# Altium PCB STM32F103ZET6.PCBDOC (part 1 of 5)
Units mil, origin at the board's own origin, x right, y up, seen from the top; angles counter-clockwise.
Board outline 7118.03 x 3660.03 mil, 2 copper layers (Top Layer, Bottom Layer); 158 components, 198 nets, 727 pads, 128 vias.
Unrouted connection lines stored in the file: 5.
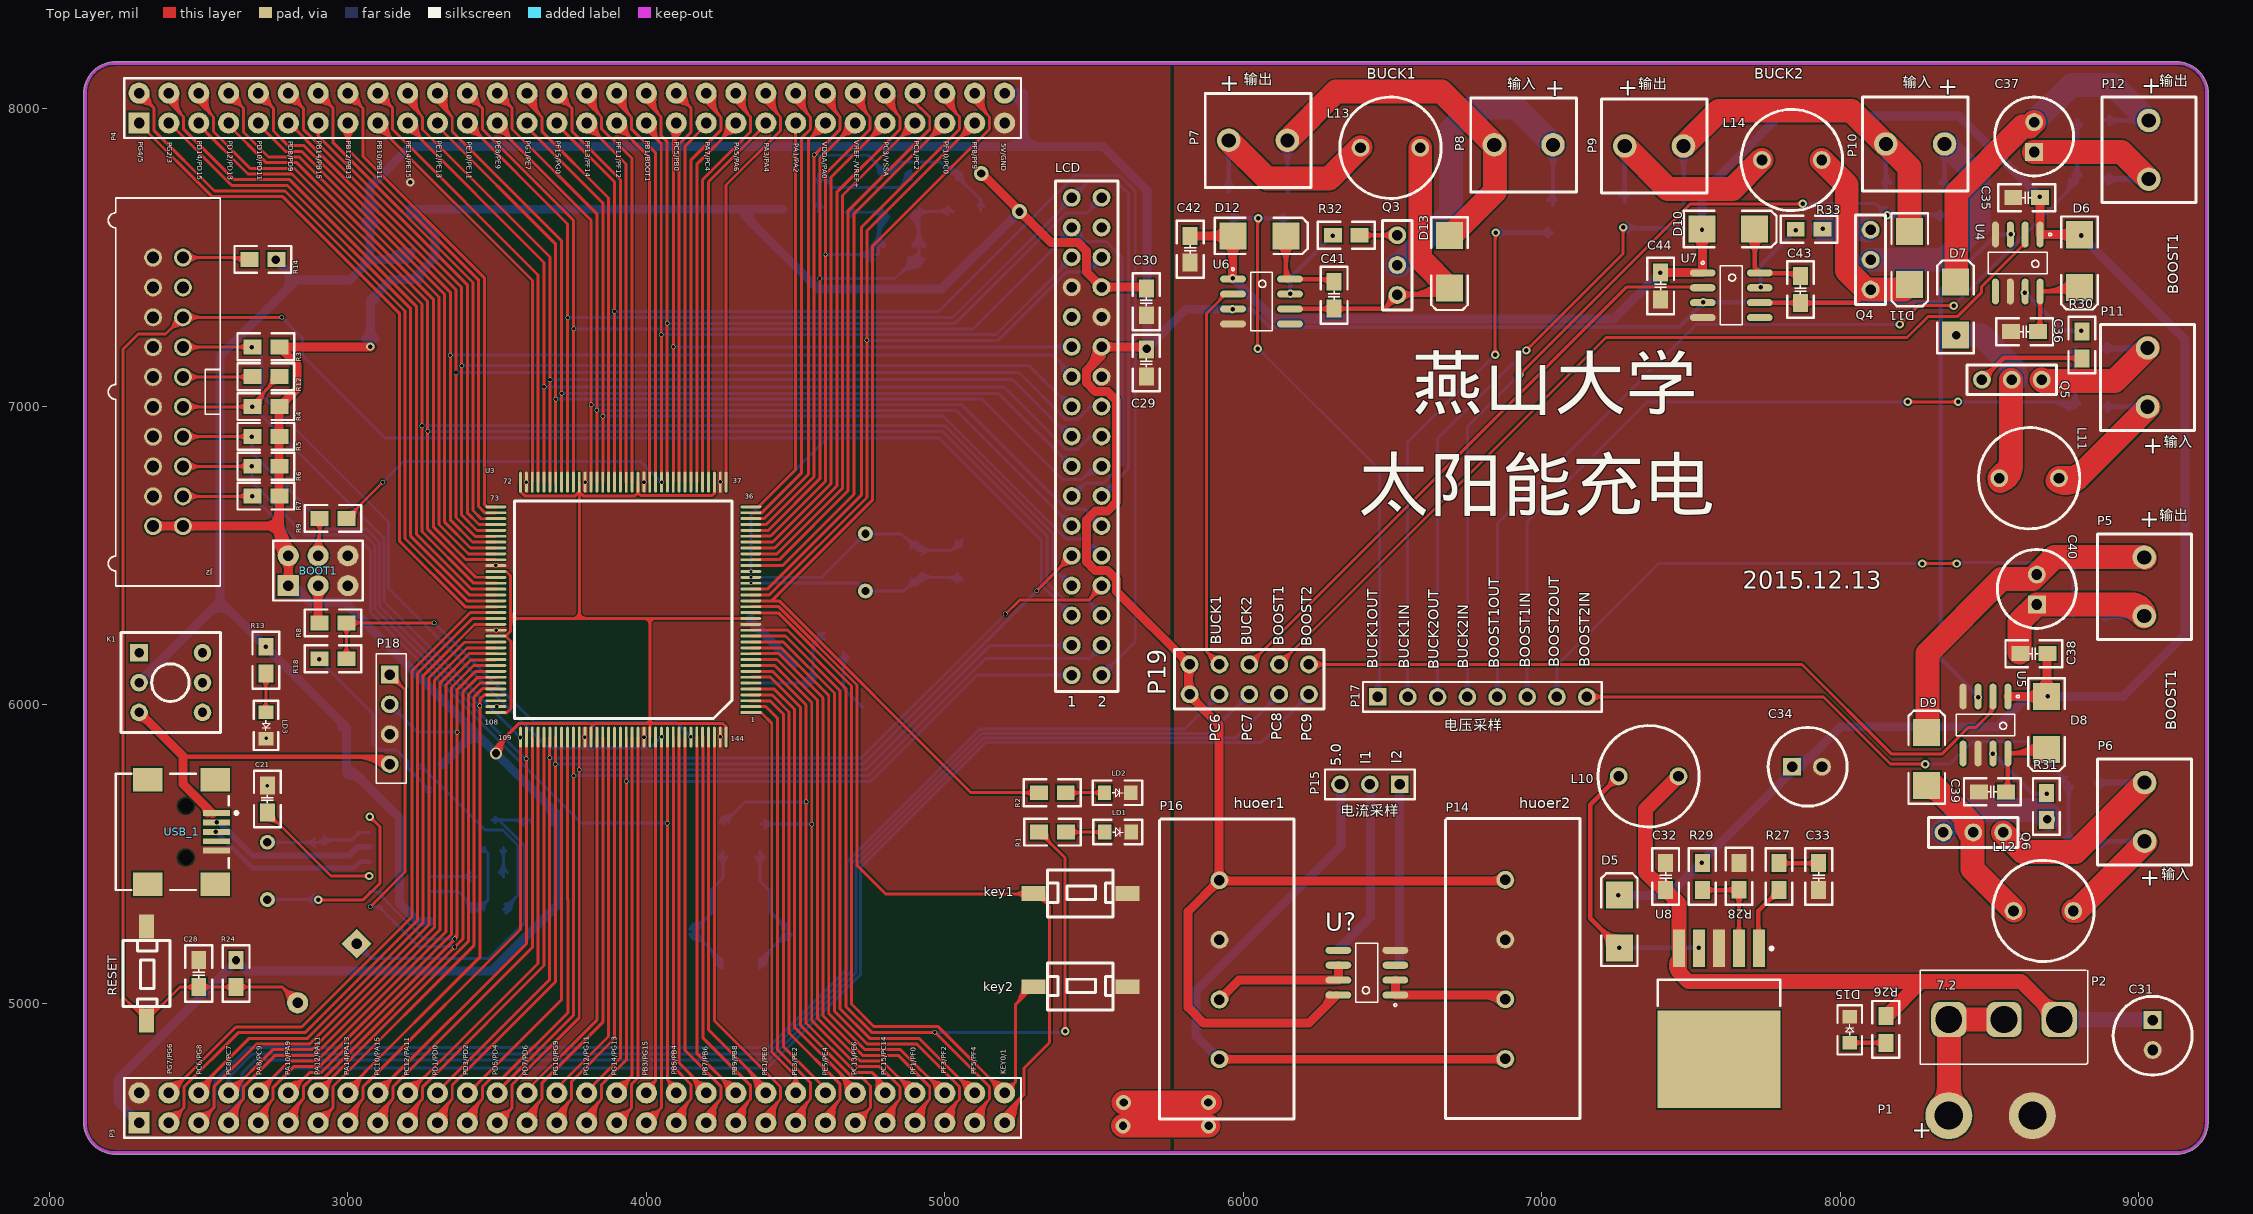
[diagram p0: Top Layer view]
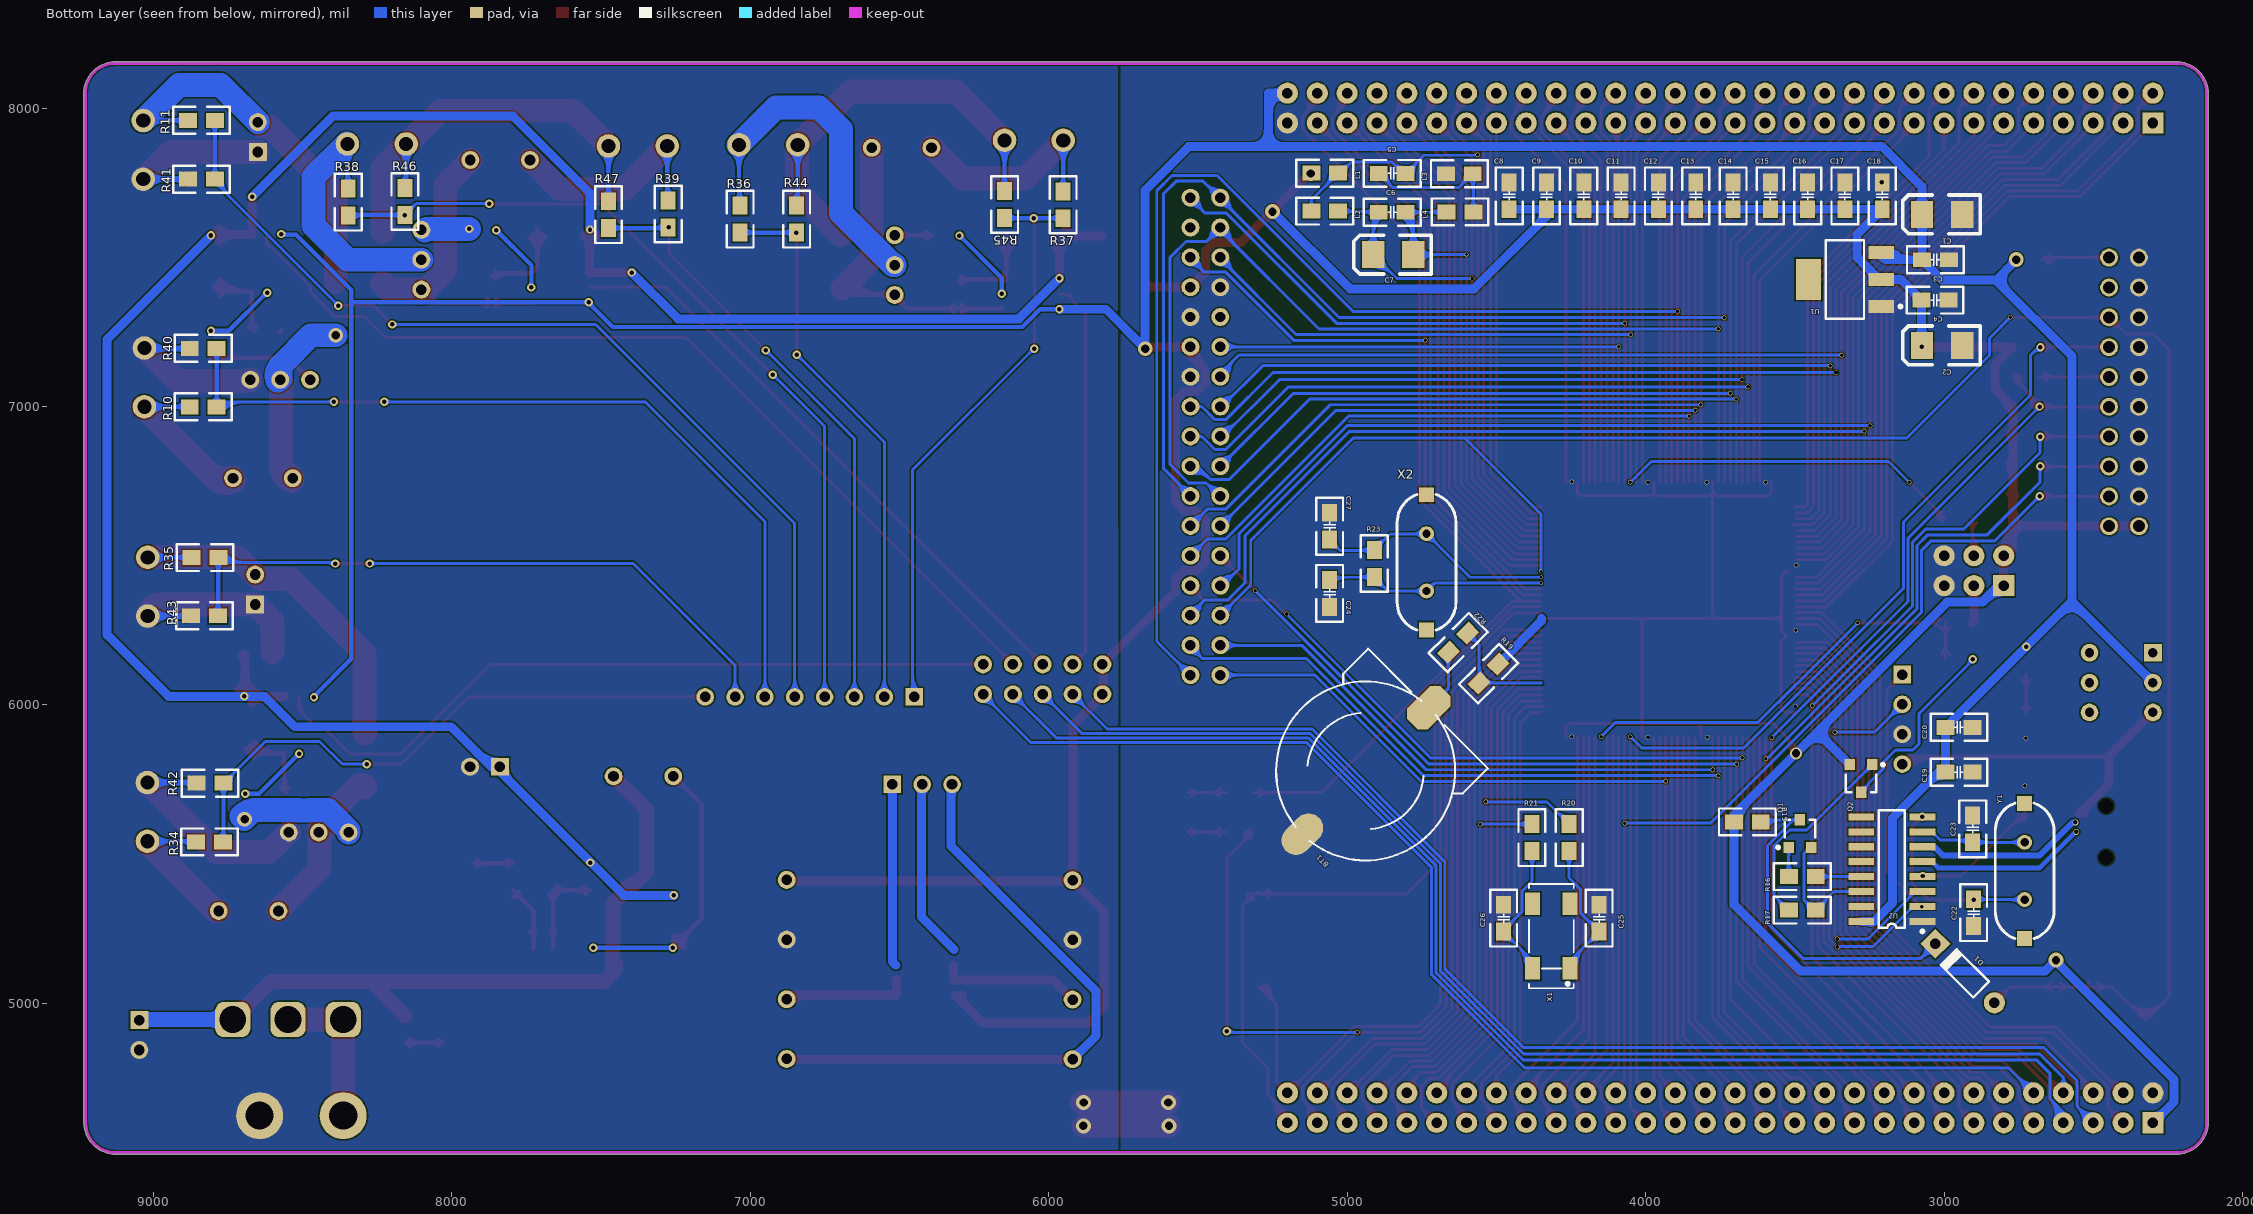
[diagram p1: Bottom Layer view, seen from below]

## Layer stack, top to bottom
Top Layer: signal copper 1.4
Dielectric: dielectric 12.6, FR-4, Dk 4.8
Bottom Layer: signal copper 1.4

## Board outline
2220,4494.98 cw(c2220,4600) 2114.99,4600 2114.99,8050 cw(c2220,8050) 2220,8155.01 9127,8155.01 cw(c9127,8150) 9127.5,8154.99 cw(c9128,8150) 9128,8155.01 cw(c9128,8050) 9233.01,8050 cw(c9228,8050) 9232.91,8049 cw(c9228,8048) 9233.01,8048 9233.01,4598 cw(c9228,4598) 9231.89,4594.83 cw(c9127,4600) 9127,4494.98 cw(c9127,4500) 9125.5,4495.21 cw(c9124,4500) 9124,4494.98

## Design rules (kind name [scope] priority, off if disabled: settings)
Clearance [All] p1: gap=5
ComponentClearance [All] p1: gap=0 collisioncheckmode=3 verticalgap=0 showdistances=FALSE
FabricationTestPointUsage TestPointUsage [All] p1: valid=0 allowmultiple=FALSE
FabricationTestpoint Testpoint [(IsPad And (OnTopLayer Or OnBottomLayer))] p1: side=3 testpointundercomponent=TRUE minsize=40 maxsize=100 preferedsize=60 minholesize=0 maxholesize=40 preferedholesize=32 testpointgrid=1 allowsidetop=TRUE allowsidebottom=TRUE usegrid=TRUE gridtolerance=0.01
HoleSize [All] p1: absolutevalues=TRUE maxlimit=300 minlimit=1 maxpercent=80.000 minpercent=20.000
PlaneConnect [All] p1: planeconnectstyle=Direct reliefexpansion=20 reliefentries=4 reliefconductorwidth=10 reliefairgap=10
PolygonConnect [All] p1: connectstyle=Direct reliefconductorwidth=10 reliefentries=4 polygonreliefangle="90 Angle" airgapwidth=10
RoutingVias [All] p1: holewidth=2 width=50 viastyle="Through Hole" minholewidth=1 minwidth=1 maxholewidth=200 maxwidth=300
SolderMaskExpansion [All] p1: expansion=4
Width [All] p1: maxlimit=80 minlimit=10 preferedwidth=10
23 further rules are at their usual default settings.

## Components (designator, comment, footprint, x,y, rotation, side; value= is the part's Value field where it differs from the comment)
BOOT1 "Header 3X2" HDR2X3 2800,6400 r0 top
BT1 "CR1220 holder" BAT 4726,5991 r225 bottom
C1 "220uF" 3528 3074,7643.78 r0 bottom
C2 "47uF" 3528 3074,7204.78 r0 bottom
C3 "100nF" 0805C 3029,7491.78 r180 bottom
C4 "100nF" 0805C 3030,7356.78 r180 bottom
C5 "100nF" 0805C 4849,7781 r0 bottom
C6 "100nF" 0805C 4849,7651 r180 bottom
C7 "10uF" 3528 4913,7509 r0 bottom
C8 "100nF" 0805C 4457,7706 r90 bottom
C9 "100nF" 0805C 4332,7706 r90 bottom
C10 "100nF" 0805C 4207,7706 r90 bottom
C11 "100nF" 0805C 4082,7706 r90 bottom
C12 "100nF" 0805C 3957,7706 r90 bottom
C13 "100nF" 0805C 3832,7706 r90 bottom
C14 "100nF" 0805C 3707,7706 r90 bottom
C15 "100nF" 0805C 3582,7706 r90 bottom
C16 "100nF" 0805C 3457,7706 r90 bottom
C17 "100nF" 0805C 3332,7706 r90 bottom
C18 "100nF" 0805C 3207,7706 r90 bottom
C19 "Cap" 0805C 2950,5775 r0 bottom
C20 "Cap" 0805C 2950,5925 r0 bottom
C21 "104" 0805C 2730,5685 r270 top
C22 "22" 0805C 2901,5304 r90 bottom
C23 "22" 0805C 2904,5585 r270 bottom
C24 "20pF" 0805C 5059,6374 r270 bottom
C25 "10pF" 0805C 4156,5285.61 r270 bottom
C26 "10pF" 0805C 4476,5285.61 r90 bottom
C27 "20pF" 0805C 5059,6599 r90 bottom
C28 "100nF" 0805C 2500,5100 r270 top
C29 "c" 0805C 5675,7146 r270 top
C30 "c" 0805C 5675,7351 r270 top
C31 "Cap Pol1" cap 9047,4944 r270 top
C32 "Cap Semi" 0805C 7415,5425 r270 top
C33 "Cap Semi" 0805C 7928,5425 r90 top
C34 "Cap Pol3" cap 7839,5793 r0 top
C35 "Cap Pol3" 0805C 8625,7700 r180 top
C36 "Cap Pol3" 0805C 8618,7251 r180 top
C37 "" cap 8650,7853 r90 top
C38 "Cap Pol3" 0805C 8649,6172 r180 top
C39 "Cap Pol3" 0805C 8510,5709 r180 top
C40 "" cap 8659,6337 r90 top
C41 "Cap Pol3" 0805C 6304,7373 r270 top
C42 "Cap Pol3" 0805C 5822,7527 r270 top
C43 "Cap Pol3" 0805C 7867,7392 r270 top
C44 "Cap Pol3" 0805C 7398,7404 r270 top
D1 "1N4148" DO-35 2930,5101 r45 bottom
D5 "D Schottky" SMB 7260,5275 r90 top
D6 "D Zener" SMB 8802,7487 r270 top
D7 "Diode" SMB 8386,7328 r90 top
D8 "D Zener" SMB 8691,5940 r270 top
D9 "Diode" SMB 8290,5819 r90 top
D10 "D Zener" SMB 7625,7595 r0 top
D11 "Diode" SMB 8233,7498 r270 top
D12 "D Zener" SMB 6054,7572 r0 top
D13 "Diode" SMB 6691,7485 r270 top
D15 "LED" 0805D 8032,4868 r90 top
J2 "JTAG" JTAG_20PIN 2447,6599 r180 top
K1 "BUTTON" BTN8.5*8.5 2300,6175 r0 top
key1 "KEY_M" key_2pin 5454,5368 r180 top
key2 "KEY_M" key_2pin 5454,5056 r180 top
L1 "BEAD" 0805R 5075,7782 r0 bottom
L2 "BEAD" 0805R 5075,7655 r0 bottom
L3 "BEAD" 0805R 4624,7780 r0 bottom
L4 "BEAD" 0805R 4622,7652 r180 bottom
L10 "Inductor" L1 7458,5761 r180 top
L11 "" L1 8533,6760 r0 top
L12 "" L1 8581,5310 r0 top
L13 "" L1 6393,7867 r0 top
L14 "" L1 7738,7826 r0 top
LCD "Component_1" LCD 5425,6100 r90 top (schematic designator *)
LD1 "Green" 0805D 5536,5574 r0 top
LD2 "Orange" 0805D 5535,5706 r0 top
LD3 "red" 0805D 2725,5975 r270 top
P1 "POWER" dianji 8644,4624 r180 top
P2 "Header 3" header3-power 8364,4946 r0 top
P3 "Header 30X2" 60pin#1 2300,4600 r90 top
P4 "Header 30X2" 60pin#2 2300,7950 r90 top
P5 "output" duanzi2-5mm 9019,6416 r270 top
P6 "input" duanzi2-5mm 9020,5622 r90 top
P7 "output" duanzi2-5mm 6030,7892 r0 top
P8 "input" duanzi2-5mm 6959,7877 r180 top
P9 "output" duanzi2-5mm 7357,7873 r0 top
P10 "input" duanzi2-5mm 8271,7880 r180 top
P11 "input" duanzi2-5mm 9030,7078 r90 top
P12 "output" duanzi2-5mm 9034,7880 r270 top
P14 "huoer" huoer 6678,4614 r90 top
P15 "Header 3" HDR1X3 6524,5734 r180 top
P16 "huoer" huoer 5720,4613 r90 top
P17 "采样" HDR1X8 6451,6027 r0 top
P18 "header4" HEADER4-PS 3140,6102 r270 top
P19 "pwm" pwm 5820,6136 r90 top
Q1 "NPN" SOT-23R 3483,5564 r180 bottom
Q2 "PNP" SOT-23R 3278,5759 r0 bottom
Q3 "AOD4184" mos3205 6516,7574 r270 top
Q4 "AOD4184" mos3205 8102,7592 r270 top
Q5 "AOD4184" mos3205 8475,7090 r0 top
Q6 "AOD4184" mos3205 8346,5573 r0 top
R1 "600" 0805R 5361,5574 r180 top
R2 "600" 0805R 5360,5706 r180 top
R3 "10K" 0805R 2725,7200 r0 top
R4 "10K" 0805R 2725,7000 r0 top
R5 "10K" 0805R 2725,6900 r0 top
R6 "10K" 0805R 2725,6800 r0 top
R7 "10K" 0805R 2725,6700 r0 top
R8 "Res2" 0805R 2950,6275 r180 top
R9 "Res2" 0805R 2950,6625 r0 top
R10 "Res2" 0805R 8833,6999 r0 bottom
R11 "Res2" 0805R 8839,7959 r0 bottom
R12 "0" 0805R 2725,7100 r0 top
R13 "2k" 0805R 2725,6150 r90 top
R14 "0" 0805R 2715,7493 r0 top
R15 "Res2" 0805R 3659,5608 r0 bottom
R16 "Res2" 0805R 3475,5425 r180 bottom
R17 "Res2" 0805R 3475,5313 r180 bottom
R18 "Res2" 0805R 2950,6155 r180 top
R19 "0" 0805R 4526,6105 r315 bottom
R20 "0" 0805R 4256,5555.61 r90 bottom
R21 "0" 0805R 4381,5555.61 r90 bottom
R22 "0" 0805R 4628,6209 r135 bottom
R23 "1M" 0805R 4909,6474 r270 bottom
R24 "10K" 0805R 2625,5100 r90 top
R26 "Res1" 0805R 8153,4913 r90 top
R27 "Res2" 0805R 7795,5425 r90 top
R28 "Res2" 0805R 7661,5426 r90 top
R29 "Res2" 0805R 7538,5425 r270 top
R30 "Res2" 0805R 8810,7206 r270 top
R31 "Res2" 0805R 8691,5660 r270 top
R32 "Res2" 0805R 6345,7574 r0 top
R33 "Res2" 0805R 7896,7594 r0 top
R34 "Res2" 0805R 8812,5541 r0 bottom
R35 "Res2" 0805R 8827,6494 r0 bottom
R36 "Res2" 0805R 7034,7628 r90 bottom
R37 "Res2" 0805R 5952,7676 r90 bottom
R38 "Res2" 0805R 8347,7685 r90 bottom
R39 "Res2" 0805R 7275,7645 r90 bottom
R40 "Res2" 0805R 8833,7195 r180 bottom
R41 "Res2" 0805R 8839,7762 r180 bottom
R42 "Res2" 0805R 8810,5738 r180 bottom
R43 "Res2" 0805R 8829,6299 r180 bottom
R44 "Res2" 0805R 6845,7628 r270 bottom
R45 "Res2" 0805R 6148,7677 r270 bottom
R46 "Res2" 0805R 8157,7687 r270 bottom
R47 "Res2" 0805R 7475,7643 r270 bottom
RESET "RESET" key_2pin 2325,5100 r90 top (schematic designator S1)
U1 "LM1117-3.3" 1117 3396,7294 r90 bottom
U2 "CH340G" SOP16M 3175,5450 r90 bottom
U3 "STM32F103ZET6" TQFP144-B 4350,5975 r180 top
U4 "IR2104S" SOIC_8 8595,7481 r270 top
U5 "IR2104S" SOIC_8 8487,5933 r270 top
U6 "IR2104S" SOIC_8 6061,7352 r0 top
U7 "IR2104S" SOIC_8 7635,7373 r0 top
U8 "LM2577_12" TS5B_N 7594,4948 r270 top
U? "LM393" SOIC_8 6414,5103 r180 top
USB_1 "USB5" USB/SM0.8-6H5 2250,5575 r180 top
X1 "MC306-G-06Q-32.768 (manufacturer JFVNY)" SM8 4316,5225.61 r90 bottom
X2 "8M" XTAL_US 4734,6574 r270 bottom
Y1 "12M" XTAL_US 2730,5347.88 r90 bottom

## Footprints (in the part's own frame and the unit in brackets; to place one, negate y for a bottom-side part, rotate by r counter-clockwise, add the part's x,y. Pads: shape width x height; smd on the part's side, far side on the other; paste and mask are expansions set on the pad)
60pin#1 [mm]
  rect 1.8x1.8 hole 0.9: 1(0,0)
  round 1.8 hole 0.9: 2(2.54,0) 3(0,-2.54) 4(2.54,-2.54) 5(0,-5.08) 6(2.54,-5.08) 7(0,-7.62) 8(2.54,-7.62) 9(0,-10.16) 10(2.54,-10.16) 11(0,-12.7) 12(2.54,-12.7) 13(0,-15.24) 14(2.54,-15.24) 15(0,-17.78) 16(2.54,-17.78) 17(0,-20.32) 18(2.54,-20.32) 19(0,-22.86) 20(2.54,-22.86) 21(0,-25.4) 22(2.54,-25.4) 23(0,-27.94) 24(2.54,-27.94) 25(0,-30.48) 26(2.54,-30.48) 27(0,-33.02) 28(2.54,-33.02) 29(0,-35.56) 30(2.54,-35.56) 31(0,-38.1) 32(2.54,-38.1) 33(0,-40.64) 34(2.54,-40.64) 35(0,-43.18) 36(2.54,-43.18) 38(2.54,-45.72) 40(2.54,-48.26) 42(2.54,-50.8) 44(2.54,-53.34) 46(2.54,-55.88) 48(2.54,-58.42) 50(2.54,-60.96) 52(2.54,-63.5) 54(2.54,-66.04) 56(2.54,-68.58) 58(2.54,-71.12) 60(2.54,-73.66)
  oval 1.7x1.8 hole 0.9: 37(0,-45.72) 39(0,-48.26) 41(0,-50.8) 43(0,-53.34) 45(0,-55.88) 47(0,-58.42) 49(0,-60.96) 51(0,-63.5) 53(0,-66.04) 55(0,-68.58) 57(0,-71.12) 59(0,-73.66)
  silkscreen extent -1.27,-75.06 3.81,1.27
60pin#2 [mm]
  rect 1.8x1.8 hole 0.9: 1(0,0)
  round 1.8 hole 0.9: 2(2.54,0) 3(0,-2.54) 4(2.54,-2.54) 5(0,-5.08) 6(2.54,-5.08) 7(0,-7.62) 8(2.54,-7.62) 9(0,-10.16) 10(2.54,-10.16) 11(0,-12.7) 12(2.54,-12.7) 13(0,-15.24) 14(2.54,-15.24) 15(0,-17.78) 16(2.54,-17.78) 17(0,-20.32) 18(2.54,-20.32) 19(0,-22.86) 20(2.54,-22.86) 21(0,-25.4) 22(2.54,-25.4) 23(0,-27.94) 24(2.54,-27.94) 25(0,-30.48) 26(2.54,-30.48) 27(0,-33.02) 28(2.54,-33.02) 29(0,-35.56) 30(2.54,-35.56) 31(0,-38.1) 32(2.54,-38.1) 33(0,-40.64) 34(2.54,-40.64) 35(0,-43.18) 36(2.54,-43.18) 37(0,-45.72) 38(2.54,-45.72) 39(0,-48.26) 40(2.54,-48.26) 41(0,-50.8) 42(2.54,-50.8) 43(0,-53.34) 44(2.54,-53.34) 45(0,-55.88) 46(2.54,-55.88) 47(0,-58.42) 48(2.54,-58.42) 49(0,-60.96) 50(2.54,-60.96) 51(0,-63.5) 52(2.54,-63.5) 53(0,-66.04) 54(2.54,-66.04) 55(0,-68.58) 56(2.54,-68.58) 57(0,-71.12) 58(2.54,-71.12) 59(0,-73.66) 60(2.54,-73.66)
  silkscreen extent -1.27,-75.06 3.81,1.27
0805C [mil]
  rect 60x50 smd: 1(-45,0) 2(45,0)
  silkscreen extent -95,-45 95,45
0805D [mil]
  rect 45x50 smd: 1(0,0) 2(88,0)
  silkscreen extent -39,-41 126,41
0805R [mil]
  rect 60x50 smd: 1(-45,0) 2(45,0)
  silkscreen extent -95,-45 95,45
1117 [mm]
  rect 1.1x2.15 smd: 1(1.05,-4.725) 2(3.35,-4.725) 3(5.65,-4.725)
  rect 3.5x2.15 smd: 4(3.35,1.475)
  silkscreen extent 0,-6.47 6.7,0
3528 [mil]
  rect 75x90 smd: 1(0,0) 2(-135,0)
  silkscreen extent -195,-65 65,65
BAT [mm]
  oct 2.5x4 smd: 1(-0.002,0.005)
  oval 2.5x4 smd: 2(-0.002,-15.235)
  round 0 all layers, no hole: ""(-0.027,-3.865) ""(-0.002,-11.365)
  silkscreen extent -7.62,-15.19 7.62,-0.04
BTN8.5*8.5 [mm]
  rect 1.5x1.5 hole 0.8: 1(0,0)
  round 1.5 hole 0.8: 2(0,-2.54) 3(0,-5.08) 4(5.4,-5.08) 5(5.4,-2.54) 6(5.4,0)
  silkscreen extent -1.55,-6.79 6.95,1.71
cap [mil]
  rect 60x60 hole 35.8: 1(0,0)
  round 60 hole 35.8: 2(100,0)
  silkscreen extent -80,-132 184,132
dianji [mm]
  round 4 hole 2.4: 1(0,0) 2(7.112,0)
DO-35 [mm] "Diode, Axial; Body 3.8 x 1.9 mm (LxDia. max), Lead Dia. 0.53 mm (max)"
  round 1.8 hole 0.9: 1(-3.55,0)
  rect 1.8x1.8 hole 0.9: 2(3.55,0)
  silkscreen extent -1.95,-0.95 2.05,0.95
duanzi2-5mm [mm]
  round 2 hole 1.2: 1(-2,0) 2(3,0)
  silkscreen extent -4,-4 5,4
HDR1X3 [mm]
  rect 1.5x1.5 hole 0.9: 1(0,0)
  round 1.5 hole 0.9: 2(2.54,0) 3(5.08,0)
  silkscreen extent -1.27,-1.27 6.35,1.27
HDR1X8 [mm]
  rect 1.5x1.5 hole 0.9: 1(0,0)
  round 1.5 hole 0.9: 2(2.54,0) 3(5.08,0) 4(7.62,0) 5(10.16,0) 6(12.7,0) 7(15.24,0) 8(17.78,0)
  silkscreen extent -1.27,-1.27 19.05,1.27
HDR2X3 [mm] "Connector; Header; 3x2 Position"
  rect 1.8x1.8 hole 0.9: 1(0,0)
  round 1.8 hole 0.9: 2(0,2.54) 3(2.54,0) 4(2.54,2.54) 5(5.08,0) 6(5.08,2.54)
  silkscreen extent -1.27,-1.27 6.35,3.81
header3-power [mm]
  rrect50% 3x3 hole 2.286: 1(0,0) 2(4.699,0) 3(9.398,0)
  silkscreen extent -2.41,-3.81 11.81,4.19
HEADER4-PS [mm]
  rect 1.5x1.5 hole 0.9: 1(0,0)
  round 1.5 hole 0.9: 2(2.54,0) 3(5.08,0) 4(7.62,0)
  silkscreen extent -1.78,-1.14 9.27,1.4
huoer [mil]
  round 60 hole 35: 1(200,-200) 2(400,-200) 3(600,-200) 4(800,-200)
  silkscreen extent 0,-450 1005,0
JTAG_20PIN [mil]
  round 60 hole 40: 1(0,0) 2(100,0) 3(0,-100) 4(100,-100) 5(0,-200) 6(100,-200) 7(0,-300) 8(100,-300) 9(0,-400) 10(100,-400) 11(0,-500) 12(100,-500) 13(0,-600) 14(100,-600) 15(0,-700) 16(100,-700) 17(0,-800) 18(100,-800) 19(0,-900) 20(100,-900)
  silkscreen extent -125,-1100 250,200
key_2pin [mil]
  rect 80x50 smd: 1(-157.48,0) 2(157.48,0)
  silkscreen extent -110,-79 110,79
L1 [mil]
  round 60 hole 35.8: 1(0,0) 2(200,0)
  silkscreen extent -70,-170 270,170
LCD [mil]
  round 60 hole 35: 1(0,0) 2(0,-100) 3(100,0) 4(100,-100) 5(200,0) 6(200,-100) 7(300,0) 8(300,-100) 9(400,0) 10(400,-100) 11(500,0) 12(500,-100) 13(600,0) 14(600,-100) 15(700,0) 16(700,-100) 17(800,0) 18(800,-100) 19(900,0) 20(900,-100) 21(1000,0) 22(1000,-100) 23(1100,0) 24(1100,-100) 25(1200,0) 26(1200,-100) 27(1300,0) 28(1300,-100) 29(1400,0) 30(1400,-100) 31(1500,0) 32(1500,-100) 33(1600,0) 34(1600,-100)
  silkscreen extent -55,-155 1655,55
mos3205 [mil]
  round 60 hole 35: 1(0,0) 2(100,0) 3(200,0)
  silkscreen extent -50,-50 250,50
pwm [mil]
  round 60 hole 35: 1(0,0) 2(0,-100) 3(0,-200) 4(0,-300) 5(0,-400) 6(-100,-400) 7(-100,-300) 8(-100,-200) 9(-100,-100) 10(-100,0)
  silkscreen extent -150,-450 50,50
SM8 [mm]
  rect 1.9x1.3 smd: 1(-2.75,-1.6) 2(2.75,-1.6) 3(2.75,1.6) 4(-2.75,1.6)
  silkscreen extent -4.44,-1.91 4.44,1.91
SMB [mm] "DO-214-AA/SMB; 2 C-Bend Leads; Body 5.3 x 3.6 mm, inc. leads (LxW)"
  rect 2.3x2.3 smd: 1(-2.25,0) 2(2.25,0)
  silkscreen extent -3.8,-1.55 4.1,1.55
SOIC_8 [mm]
  oval 2.2x0.6 smd: 1(-2.425,1.905) 2(-2.425,0.635) 3(-2.425,-0.635) 4(-2.425,-1.905) 5(2.425,-1.905) 6(2.425,-0.635) 7(2.425,0.635) 8(2.425,1.905)
  silkscreen extent -2.55,-2.5 0.93,2.88, body extent -2,-2.5 2,2.5, height 1.75
SOP16M [mm]
  rect 0.6x2.2 smd: 1(-4.445,-2.6) 2(-3.175,-2.6) 3(-1.905,-2.6) 4(-0.635,-2.6) 5(0.635,-2.6) 6(1.905,-2.6) 7(3.175,-2.6) 8(4.445,-2.6) 9(4.445,2.6) 10(3.175,2.6) 11(1.905,2.6) 12(0.635,2.6) 13(-0.635,2.6) 14(-1.905,2.6) 15(-3.175,2.6) 16(-4.445,2.6)
  silkscreen extent -5.42,-2.72 5,1.1
SOT-23R [mm]
  rect 0.9x0.95 smd: 1(0.95,-1.048) 2(-0.95,-1.048) 3(0,1.302)
  silkscreen extent -1.98,-1.17 1.3,1.3
TQFP144-B [mil]
  rect 70x9.5 smd: 1(0.11,0.06)
  oval 70x9.5 smd: 2(0.11,-19.63) 3(0.11,-39.31) 4(0.11,-59) 5(0.11,-78.68) 6(0.11,-98.37) 7(0.11,-118.05) 8(0.11,-137.74) 9(0.11,-157.42) 10(0.11,-177.11) 11(0.11,-196.79) 12(0.11,-216.48) 13(0.11,-236.16) 14(0.11,-255.85) 15(0.11,-275.53) 16(0.11,-295.22) 17(0.11,-314.9) 18(0.11,-334.59) 19(0.11,-354.27) 20(0.11,-373.96) 21(0.11,-393.64) 22(0.11,-413.33) 23(0.11,-433.01) 24(0.11,-452.7) 25(0.11,-472.38) 26(0.11,-492.07) 27(0.11,-511.75) 28(0.11,-531.44) 29(0.11,-551.12) 30(0.11,-570.81) 31(0.11,-590.49) 32(0.11,-610.18) 33(0.11,-629.86) 34(0.11,-649.55) 35(0.11,-669.23) 36(0.11,-688.92) 73(854.44,-688.92) 74(854.44,-669.23) 75(854.44,-649.55) 76(854.44,-629.86) 77(854.44,-610.18) 78(854.44,-590.5) 79(854.44,-570.81) 80(854.44,-551.12) 81(854.44,-531.44) 82(854.44,-511.75) 83(854.44,-492.07) 84(854.44,-472.38) 85(854.44,-452.7) 86(854.44,-433.01) 87(854.44,-413.33) 88(854.44,-393.64) 89(854.44,-373.96) 90(854.44,-354.27) 91(854.44,-334.59) 92(854.44,-314.9) 93(854.44,-295.22) 94(854.44,-275.53) 95(854.44,-255.85) 96(854.44,-236.16) 97(854.44,-216.48) 98(854.44,-196.79) 99(854.44,-177.11) 100(854.44,-157.42) 101(854.44,-137.74) 102(854.44,-118.05) 103(854.44,-98.37) 104(854.44,-78.68) 105(854.44,-59) 106(854.44,-39.31) 107(854.44,-19.63) 108(854.44,0.06)
  oval 9.5x70 smd: 37(82.79,-771.6) 38(102.47,-771.6) 39(122.16,-771.6) 40(141.84,-771.6) 41(161.53,-771.6) 42(181.21,-771.6) 43(200.9,-771.6) 44(220.58,-771.6) 45(240.27,-771.6) 46(259.95,-771.6) 47(279.64,-771.6) 48(299.32,-771.6) 49(319.01,-771.6) 50(338.69,-771.6) 51(358.38,-771.6) 52(378.06,-771.6) 53(397.75,-771.6) 54(417.43,-771.6) 55(437.12,-771.6) 56(456.8,-771.6) 57(476.49,-771.6) 58(496.17,-771.6) 59(515.86,-771.6) 60(535.54,-771.6) 61(555.23,-771.6) 62(574.91,-771.6) 63(594.6,-771.6) 64(614.28,-771.6) 65(633.97,-771.6) 66(653.65,-771.6) 67(673.34,-771.6) 68(693.02,-771.6) 69(712.71,-771.6) 70(732.39,-771.6) 71(752.08,-771.6) 72(771.76,-771.6) 109(771.76,82.73) 110(752.08,82.73) 111(732.39,82.73) 112(712.71,82.73) 113(693.02,82.73) 114(673.34,82.73) 115(653.65,82.73) 116(633.97,82.73) 117(614.28,82.73) 118(594.6,82.73) 119(574.91,82.73) 120(555.23,82.73) 121(535.54,82.73) 122(515.86,82.73) 123(496.17,82.73) 124(476.49,82.73) 125(456.8,82.73) 126(437.12,82.73) 127(417.43,82.73) 128(397.75,82.73) 129(378.06,82.73) 130(358.38,82.73) 131(338.69,82.73) 132(319.01,82.73) 133(299.32,82.73) 134(279.64,82.73) 135(259.95,82.73) 136(240.27,82.73) 137(220.58,82.73) 138(200.9,82.73) 139(181.21,82.73) 140(161.53,82.73) 141(141.84,82.73) 142(122.16,82.73) 143(102.47,82.73) 144(82.79,82.73)
  silkscreen extent 63,-709 792,20
TS5B_N [mm]
  rect 3.2x1.05 smd: 1(-6,3.4) 2(-6,1.7) 3(-6,0) 4(-6,-1.7) 5(-6,-3.4)
  rect 8.3x10.45 smd: GND(3.45,0)
  silkscreen extent -6.12,-5.2 -1.1,5.2, body extent -3.35,-5.2 6.05,5.2, height 4.65
USB/SM0.8-6H5 [mm]
  rect 2.3x0.5 smd: 1(-7.85,-1.6) 2(-7.85,-0.8) 3(-7.85,0) 4(-7.85,0.8) 5(-7.85,1.6)
  rect 2.5x2 smd: 6(-7.75,4.45) 7(-1.996,4.45) 8(-7.75,-4.45) 9(-1.996,-4.45)
  round 0.6 hole 1.27 unplated: MH1(-5.25,2.2) MH2(-5.25,-2.2)
  silkscreen extent -9.68,-4.95 0.7,4.95
XTAL_US [mil]
  round 50 hole 28: 1(0,0) 2(192.13,0)
  rect 50x50 smd: ""(-130.32,0) ""(322.44,0)
  silkscreen extent -131,-98 323,98

## Part data
BOOT1: "Header, 3-Pin, Dual row"
BT1: library part BATTERY, "Battery"
C1 C2: library part "Cap Pol1", "Polarized Capacitor (Radial)"
C3 C4 C5 C6 C7 C29 C30 C37 C40: library part Cap, "Capacitor"
C8 C9 C10 C11 C12 C13 C14 C15 C16 C17 C18 C24 C25 C26 C27 C28: library part CAP, "Capacitor"
C19 C20: "Capacitor"
C21 C22 C23: library part C
C31: "Polarized Capacitor (Radial)"
C32 C33: "Capacitor (Semiconductor SIM Model)"
C34 C35 C36 C38 C39 C41 C42 C43 C44: "Polarized Capacitor (Surface Mount)"
D1: library part "Diode 1N4148", "High Conductance Fast Diode"
D5: "Schottky Diode"
D6 D8 D10 D12: "Zener Diode"
D7 D9 D11 D13: "Default Diode"
D15 LD1 LD2 LD3: library part LED2, "Typical RED, GREEN, YELLOW, AMBER GaAs LED"
J2: library part "HEADER 10X2"
L1 L2 L3 L4 L11 L12 L13 L14: library part Inductor, "Inductor"
P1: library part "Header 2", "Header, 2-Pin"
P2 P15: "Header, 3-Pin"
P3 P4: "Header, 30-Pin, Dual row"
P5 P6 P7 P8 P9 P10 P11 P12: library part Header2
P17: library part "Header 8", "Header, 8-Pin"
Q1: "8050/BCW846/BCW847"
Q2: "8550/BCW68"
Q3 Q4 Q5 Q6: library part NMOS-2, "N-Channel Power MOSFET"
R1 R2 R3 R4 R5 R6 R7 R12 R14 R19 R20 R21 R22 R23: library part Res1, "Resistor"
R8 R9 R10 R11 R15 R16 R17 R18 R26 R27 R28 R29 R30 R31 R32 R33 R34 R35 R36 R37 R38 R39 R40 R41 R42 R43 R44 R45 R46 R47: "Resistor"
R13 R24: library part res1, "Resistor"
RESET: library part SW-PB
U1: library part VOLTREG1
U2: "USB2UART"
U?: library part LM358
X1: library part MC306
X2 Y1: library part XTAL, "Crystal Oscillator"

## Via types
v1: diameter 15, hole 12, Top Layer to Bottom Layer, 57 vias
v2: diameter 28, hole 15, Top Layer to Bottom Layer, 53 vias
v3: diameter 50, hole 28, Top Layer to Bottom Layer, 10 vias
v4: diameter 12, hole 10, Top Layer to Bottom Layer, 4 vias
v5: diameter 20, hole 15, Top Layer to Bottom Layer, 2 vias
v6: diameter 48, hole 28, Top Layer to Bottom Layer, 1 vias
v7: diameter 40, hole 28, Top Layer to Bottom Layer, 1 vias

## Nets (pads, with @x,y where several pads share a name; then routed paths per layer and width w, separated by ;. In a path a pad name is that pad's centre, name@x,y a point inside that pad or via, vN(x,y) a via of type N, cw(c..) or ccw(c..) an arc to the next point about the centre after c; other vN are vias at no path point)
5.0: P14.1 P15.3 P16.1 | length 2319.5
  Top Layer w30: P16.1@5920,4813 6877,4813 P14.1@6878,4814 P14.1@6880,4816 ; P16.1@5930.61,4802.39 cw(c5956.21,4776.79) 5956.21,4813 cw(c5956.21,4849.21) P16.1@5930.61,4823.61 ; 6839.37,4813 ccw(c6839.37,4852.63) P14.1@6867.39,4824.61 ; 6844.2,4813 cw(c6844.2,4780.2) P14.1@6867.39,4803.39
  Bottom Layer w30: P16.1@5905,4813 ccw(c5868.79,4813) 5894.39,4838.61 ccw(c5920,4864.21) P16.1@5920,4828 ; P16.1@5920,4813 5841,4892 5841,5041 6327,5527 P15.3@6327,5731 ; P15.3@6313.73,5723.73 cw(c6281.68,5691.68) 6327,5691.68
+3V3: BOOT1.1 BOOT1.2 C2.1 C4.1 C8.1 C9.1 C10.1 C11.1 C12.1 C13.1 C14.1 C15.1 C16.1 C17.1 C18.1 C30.1 J2.1 J2.2 L1.2 LCD.28 P3.1 Q2.1 R3.2 R4.2 R5.2 R6.2 R7.2 R15.2 R19.1 R24.2 U1.2 U3.17 U3.39 U3.52 U3.62 U3.72 U3.84 U3.95 U3.108 U3.121 U3.131 U3.144 | length 17637.8
  Top Layer w10: v7@3493.5,5842.33 ccw(c3462.73,5895.62) 3522.17,5879.7 ; v7@3493.71,5842.44 ccw(c3482.24,5864.69) 3506.42,5858.21 ; U3.108@3495.56,5974.94 3532.94,5974.94 ; v7(3496,5838) 3496,5861.14 ; v7@3498.5,5833.67 ccw(c3479.8,5866.06) 3515.92,5856.38 ; 3507.02,5860.47 ccw(c3526.07,5855.36) v7@3508.99,5845.5 ; U3.84@3522,6447 3531,6447 3544,6434 3544,6246 3529,6231 3528,6231 3546,6213 3546,5988 3532.94,5974.94 ; 3545.1,6289.9 4011,6289.9 ; 3546,6270 cw(c3565.18,6269.45) 3565.64,6288.64 ; 3546.36,6310.64 ccw(c3565.55,6310.18) 3565,6291 ; U3.72@3578.24,6746.6 3578.24,6714.76 3592,6701 3762,6701 U3.62@3775.09,6714.09 ; 3754.36,6290.36 ccw(c3754.82,6309.55) 3774,6309 ; 3775.09,6291.09 U3.62@3775.09,6713.91 ; U3.62@3775.09,6746.6 U3.62@3775.09,6714.09 ; 3775.36,6310.64 ccw(c3794.55,6310.18) 3794,6291 ; U3.121@3814,5893 3814,5925 3826.12,5937.12 ; 3827.88,5937.12 3826.12,5937.12 ; U3.52@3971.94,6746.6 3971.94,6710 ; 3992.36,5937.36 ccw(c3992.82,5956.55) 4011.31,5951.41 4011.31,6289.69 ; 3993,6290 cw(c3992.45,6270.82) 4011.64,6270.36 ; 4011,5957 ccw(c4030.18,5956.54) 4029.64,5937.36 ; 4011,6271 cw(c4030.18,6270.45) 4030.64,6289.64 ; 4011.1,6289.9 U3.17@4349.89,6289.9 ; U3.131@4011.31,5892.27 4011.31,5937.27 ; U3.39@4227.84,6746.6 4227.84,6708.84 ; U3.144@4267.21,5892.27 4267.21,5926.79 4256.73,5937.27 4011.31,5937.27 ; 3496,5861.14 cw(c3485.65,5861.14) 3489.88,5851.69 ccw(c3485.65,5861.14) 3496,5861.14 ; 3496,5861.14 ccw(c3506.35,5861.14) 3502.12,5851.69 cw(c3506.35,5861.14) 3496,5861.14 ; 3496,5861.14 3572.13,5937.27 3800.88,5937.27 3801.03,5937.12 3826.12,5937.12 ; 3532.94,5974.94 cw(c3529.2,5978.69) 3525.64,5974.76 ccw(c3529.2,5978.69) 3532.94,5974.94 ; U3.62@3775.09,6713.91 U3.62@3775.09,6714.09 ; U3.62@3775.09,6713.91 3788,6701 3962,6701 3971,6710 ; 3826.12,5937.12 3826.27,5937.27 3991.73,5937.27 4011.31,5937.27 ; 3971,6710 ccw(c3966.94,6714.06) 3972.17,6716.45 cw(c3966.94,6714.06) 3971,6710 ; 3971,6710 3971.94,6710 ; 3971.94,6710 3972,6710 3980.4,6701.6 4220.6,6701.6 4227.84,6708.84 ; 4227.84,6708.84 ccw(c4223.91,6712.78) 4228.03,6716.51 cw(c4223.91,6712.78) 4227.84,6708.84 ; v7@3491,5838 cw(c3534.79,5838) 3503.83,5868.97 ccw(c3534.79,5838) v7@3491,5838 ; v7@3501,5838 cw(c3568.93,5838) 3520.9,5886.04 ccw(c3568.93,5838) v7@3501,5838 ; v7@3511,5838 cw(c3603.08,5838) 3537.97,5903.11 ccw(c3603.08,5838) v7@3511,5838 ; U3.108@3525.81,5974.69 ccw(c3525.81,5991.31) 3537.56,5979.56 cw(c3525.81,5991.31) U3.108@3525.81,5974.69 ; U3.95@3525.81,6230.6 ccw(c3525.81,6237.33) 3530.57,6232.57 cw(c3525.81,6237.33) U3.95@3525.81,6230.6 ; U3.84@3525.81,6447.63 cw(c3525.81,6436.64) 3533.59,6444.41 ccw(c3525.81,6436.64) U3.84@3525.81,6447.63 ; U3.121@3814.21,5922.52 cw(c3820.7,5922.52) 3816.11,5927.11 ccw(c3820.7,5922.52) U3.121@3814.21,5922.52 ; 3968.54,6707.54 ccw(c3959.73,6716.35) 3972.19,6716.35 cw(c3959.73,6716.35) 3968.54,6707.54 ; U3.52@3971.69,6716.35 ccw(c3986.26,6716.35) 3975.96,6706.04 cw(c3986.26,6716.35) U3.52@3971.69,6716.35 ; 4222.96,6703.96 ccw(c4210.58,6716.35) 4228.09,6716.35 cw(c4210.58,6716.35) 4222.96,6703.96 ; 4264.62,5929.38 cw(c4257.76,5922.52) 4267.46,5922.52 ccw(c4257.76,5922.52) 4264.62,5929.38
  Top Layer w30: J2.2@2347,6599 J2.1@2447,6599 2767,6599 ; 2725.23,6599.23 ccw(c2725.23,6641) 2767,6641 ; 2728,6600 cw(c2728,6558.23) 2769.77,6558.23 ; R7.2@2763.28,6700 R7.2@2769,6700 ; R7.2@2770,6700 R7.2@2770,6695 ; 2770.04,6533.42 ccw(c2793.34,6546.87) BOOT1.2@2797.13,6520.23 ; R7.2@2771,6690 R7.2@2770,6695 ; 2780.87,6572.61 cw(c2724.6,6540.12) BOOT1.2@2781.96,6509.6 ; BOOT1.2@2800,6499 2770,6529 ; BOOT1.1@2801,6400 BOOT1.2@2801,6499 ; v2@3076,7200 R3.2@2770,7200 2830,7140 2830,7060 R4.2@2770,7000 2769,6999 R7.2@2769,6700 ; v3@5120,7782 5123,7782 5355,7550 5445.71,7550 5475,7520.71 5475,7450 LCD.28@5525,7400 5672,7400 C30.1@5675,7397 ; 2383.21,6599 cw(c2383.21,6635.21) 2357.61,6609.61 ccw(c2383.21,6635.21) 2383.21,6599 ; 2383.21,6599 ccw(c2383.21,6562.79) 2357.61,6588.39 cw(c2383.21,6562.79) 2383.21,6599 ; 2410.79,6599 cw(c2410.79,6562.79) 2436.39,6588.39 ccw(c2410.79,6562.79) 2410.79,6599 ; 2410.79,6599 ccw(c2410.79,6635.21) 2436.39,6609.61 cw(c2410.79,6635.21) 2410.79,6599 ; 2483.21,6599 cw(c2483.21,6635.21) 2457.61,6609.61 ccw(c2483.21,6635.21) 2483.21,6599 ; 2483.21,6599 ccw(c2483.21,6562.79) 2457.61,6588.39 cw(c2483.21,6562.79) 2483.21,6599 ; R7.2@2769,6700 2769.04,6699.81 R7.2@2770,6695 ; 2770,6529 cw(c2746.28,6505.28) 2779.67,6502 ccw(c2746.28,6505.28) 2770,6529 ; 2770,6529 ccw(c2792.13,6551.13) 2796.89,6520.2 cw(c2792.13,6551.13) 2770,6529 ; 2770,6529 R7.2@2770,6695 ; 5499.39,7425.61 cw(c5473.79,7400) 5510,7400 ccw(c5473.79,7400) 5499.39,7425.61 ; 5499.39,7425.61 ccw(c5525,7451.21) 5525,7415 cw(c5525,7451.21) 5499.39,7425.61 ; 5561.21,7400 cw(c5561.21,7436.21) 5535.61,7410.61 ccw(c5561.21,7436.21) 5561.21,7400 ; 5561.21,7400 ccw(c5561.21,7363.79) 5535.61,7389.39 cw(c5561.21,7363.79) 5561.21,7400 ; 2769,6726.56 ccw(c2796.56,6726.56) 2777.07,6707.07 cw(c2796.56,6726.56) 2769,6726.56 ; 2769,6773.44 cw(c2796.56,6773.44) 2777.07,6792.93 ccw(c2796.56,6773.44) 2769,6773.44 ; 2769,6826.56 ccw(c2796.56,6826.56) 2777.07,6807.07 cw(c2796.56,6826.56) 2769,6826.56 ; 2769,6873.44 cw(c2796.56,6873.44) 2777.07,6892.93 ccw(c2796.56,6873.44) 2769,6873.44 ; 2769,6926.56 ccw(c2796.56,6926.56) 2777.07,6907.07 cw(c2796.56,6926.56) 2769,6926.56 ; 2769,6973.44 cw(c2796.56,6973.44) 2777.07,6992.93 ccw(c2796.56,6973.44) 2769,6973.44 ; 2770,6549.33 ccw(c2849.33,6549.33) 2793.24,6493.24 cw(c2849.33,6549.33) 2770,6549.33 ; 2770,6621.76 ccw(c2921.76,6621.76) 2814.45,6514.45 cw(c2921.76,6621.76) 2770,6621.76 ; R4.2@2785,7000 cw(c2821.21,7000) 2795.61,7025.61 ccw(c2821.21,7000) R4.2@2785,7000 ; R3.2@2785,7200 ccw(c2821.21,7200) 2795.61,7174.39 cw(c2821.21,7200) R3.2@2785,7200 ; BOOT1.1@2785.55,6414.45 ccw(c2748.26,6451.74) 2801,6451.74 cw(c2748.26,6451.74) BOOT1.1@2785.55,6414.45 ; BOOT1.2@2785.55,6485.55 cw(c2748.26,6448.26) 2801,6448.26 ccw(c2748.26,6448.26) BOOT1.2@2785.55,6485.55 ; 2801,6446.92 ccw(c2846.92,6446.92) 2814.45,6414.45 cw(c2846.92,6446.92) 2801,6446.92 ; 2801,6453.08 cw(c2846.92,6453.08) 2814.45,6485.55 ccw(c2846.92,6453.08) 2801,6453.08 ; v3@5122,7771 cw(c5122,7742.03) 5142.49,7762.51 ccw(c5122,7742.03) v3@5122,7771 ; 5231.51,7673.49 cw(c5211.03,7653) 5240,7653 ccw(c5211.03,7653) 5231.51,7673.49 ; v3@5250,7643 cw(c5250,7614.03) 5270.49,7634.51 ccw(c5250,7614.03) v3@5250,7643 ; 5648.44,7400 ccw(c5648.44,7427.56) 5667.93,7408.07 cw(c5648.44,7427.56) 5648.44,7400
  Bottom Layer w30: P3.1@2299,4601 2229,4671 2229,4745 2625,5141 v3(2625,5145) 2661,5109 3481,5109 3704,5332 R15.2@3704,5608 3704,5630 v7(3496,5838) 3465,5869 ; 2605.1,5121.1 ccw(c2581.2,5145) v3@2615,5145 ; 2871.93,6346.07 2818,6400 BOOT1.1@2800,6400 2804,6396 2819,6396 2870.43,6344.57 2988.43,6344.57 2991,6342 ; 2989.43,6344.57 3458.87,5875.13 ; C2.1@3075,7205 C4.1@3075,7356 ; C4.1@3075,7356.78 C4.1@3075,7356 ; U1.2@3209.98,7425.89 3144.89,7425.89 C4.1@3075,7356 ; U1.2@3212,7425 3216,7425 3261.79,7470.79 3262.24,7470.79 3291,7499.55 3291,7577 C18.1@3207,7661 C17.1@3332,7661 C16.1@3457,7661 C15.1@3582,7661 C14.1@3707,7661 C13.1@3832,7661 C12.1@3957,7661 C11.1@4082,7661 C10.1@4207,7661 C9.1@4328,7661 ; U1.2@3227.32,7431.65 ccw(c3208.32,7464.57) 3245.03,7454.73 ; Q2.1@3315.4,5800.26 3316.26,5800.26 3423,5907 ; 3385,5868 ccw(c3350.77,5908.36) 3389.24,5944.7 ; 3388.3,5873.24 cw(c3424.64,5834.77) 3393.72,5877.72 cw(c3424.64,5834.77) 3394.12,5878 cw(c3424.64,5834.77) 3458.87,5875.13 ; 3677.39,5651.34 ccw(c3732.56,5666.13) R15.2@3704,5616.66 ; C9.1@4327,7647.34 cw(c4298.44,7597.87) 4353.61,7612.66 ; C9.1@4328,7662 C9.1@4328,7661 ; 4349,6290 4349,6282 R19.1@4494.18,6136.82 ; C8.1@4457,7661 C9.1@4332,7661 C9.1@4328,7661 ; v3@5250.5,7654.5 4990,7394 4575,7394 4328,7641 C9.1@4328,7661 ; P3.1@2265.12,4634.88 cw(c2230.24,4600) 2279.57,4600 ccw(c2230.24,4600) P3.1@2265.12,4634.88 ; P3.1@2265.12,4634.88 ccw(c2300,4669.76) 2300,4620.43 cw(c2300,4669.76) P3.1@2265.12,4634.88 ; BOOT1.1@2800,6379.57 cw(c2800,6294.02) 2860.49,6354.51 ccw(c2800,6294.02) BOOT1.1@2800,6379.57 ; BOOT1.1@2800,6379.57 cw(c2800,6286.78) 2865.61,6352.39 ccw(c2800,6286.78) BOOT1.1@2800,6379.57 ; 3458.87,5875.13 cw(c3424.64,5834.77) 3465,5869 ; 3458.87,5875.13 3465,5869 ; C2.1@3058.09,7228.19 ccw(c3017.27,7269.01) 3075,7269.01 cw(c3017.27,7269.01) C2.1@3058.09,7228.19 ; 3075,7264.19 ccw(c3125.91,7264.19) 3089.91,7228.19 cw(c3125.91,7264.19) 3075,7264.19 ; C4.1@3090,7356.78 cw(c3124.33,7356.78) 3100.06,7381.06 ccw(c3124.33,7356.78) C4.1@3090,7356.78 ; C18.1@3207,7646 cw(c3207,7609.79) 3232.61,7635.39 ccw(c3207,7609.79) C18.1@3207,7646 ; U1.2@3237.3,7425.89 cw(c3286.57,7425.89) 3251.73,7460.73 ccw(c3286.57,7425.89) U1.2@3237.3,7425.89 ; 3662.84,5671.16 cw(c3599.67,5608) 3689,5608 ccw(c3599.67,5608) 3662.84,5671.16 ; C9.1@4342,7656 ccw(c4412.01,7656) 4362.51,7606.49 cw(c4412.01,7656) C9.1@4342,7656 ; 5231.22,7635.22 cw(c5250,7616.44) 5250,7643 ccw(c5250,7616.44) 5231.22,7635.22
  other v2: 3075,7201
  other v3: 5250,7653 5122,7781
+5V: C1.1 C3.1 C19.2 C20.2 C29.1 K1.2 LCD.24 P4.60 P14.4 P16.4 P19.1 P19.10 R13.2 R14.2 U1.3 U2.16 U4.3 U5.3 U6.3 U7.3 U?.8 | length 18464.8
  Top Layer w30: 5478.68,7124.39 ccw(c5403.08,7200) LCD.24@5510,7200 ; LCD.24@5535.61,7189.39 cw(c5561.21,7163.79) 5561.21,7200 cw(c5561.21,7236.21) LCD.24@5535.61,7210.61 ; 5639.79,7200 cw(c5639.79,7157.79) C29.1@5669.64,7187.64 ; 5641.2,7200 cw(c5641.2,7162.2) C29.1@5667.93,7188.93 ; C29.1@5676,7188 5664,7200 LCD.24@5525,7200 5525,7170.71 5475,7120.71 5475,7079.29 5504.29,7050 5545.71,7050 5575,7020.71 5575,6679.29 5545.71,6650 5504.29,6650 5475,6620.71 5475,6479.29 5504.29,6450 5545.71,6450 5575,6420.71 5575,6381 5817,6139 5817,6035 5918,5934 P16.4@5918,5411 ; P19.1@5805,6136 ccw(c5768.79,6136) 5794.39,6161.61 ccw(c5820,6187.21) P19.1@5820,6151 ; 5817,6079.46 ccw(c5863.46,6079.46) P19.10@5830.61,6046.61 ; 5817,6092.54 cw(c5863.46,6092.54) P19.1@5830.61,6125.39 ; P19.10@5835,6036 ccw(c5880.87,6036) 5848.44,6003.56 ; P16.4@5905,5413 cw(c5868.79,5413) 5894.39,5387.39 cw(c5920,5361.79) P16.4@5920,5398 ; P16.4@5909.39,5423.61 ccw(c5888.62,5444.38) 5918,5444.38 ; 5918,5454.04 ccw(c5961.04,5454.04) 5930.61,5423.61 ccw(c5963.46,5456.46) 5963.46,5410 ; P16.4@5920,5413 P16.4@5918,5411 ; 6273.41,4987.41 ccw(c6232.81,5028) U?.8@6290.22,5028 ; U?.8@6313,5027 6220,4934 5868,4934 5815,4987 5815,5308 P16.4@5918,5411 ; 6832.13,5410 ccw(c6832.13,5459.87) P14.4@6867.39,5424.61 ; P14.4@6879,5417 6872,5410 5918,5410 P16.4@5918,5411
  Bottom Layer w15: v2(5964,7326) 6029.11,7326 6088.61,7266.5 7460.5,7266.5 v2@7543.5,7349.5 ; v2@5968.6,7321.4 cw(c5979.69,7310.31) 5979.69,7326 cw(c5979.69,7341.69) v2@5968.6,7330.6 ; 7527.78,7333.78 ccw(c7511.57,7350) v2@7534.5,7350 ; v2(7541,7350) 7541.5,7349.5 v2@7543.5,7349.5 ; v2@7545.6,7345.4 cw(c7556.69,7334.31) 7556.69,7350 cw(c7556.69,7365.69) v2@7545.6,7354.6 ; 8339,7350 8120.1,7350 8119.6,7349.5 8084.4,7349.5 8083.9,7350 7544,7350 v2@7543.5,7349.5 ; 8448.78,6042.22 cw(c8432.57,6026) v2@8455.5,6026 ; v2@8462,6029 8336.5,6154.5 8336.5,7390.5 8522,7576 v2@8569,7576 ; 8551.48,7576 ccw(c8551.48,7598.52) v2@8567.4,7582.6
  Bottom Layer w30: K1.2@2300,6076 2568,6344 2576,6344 ; 2534.51,6307.83 cw(c2572.45,6273.04) 2612,6306 ; v3@2758,7491 2825,7424 3006.22,7424 C3.1@3074,7491.78 ; 2787,7463 cw(c2752.77,7424.13) 2789.26,7387.38 ; 2830,7423 2826,7423 2571,7168 2571,6349 v2(2725,6195) C20.2@2995,5925 2995,5776 3017,5776 3173,5620 3173,5336 3234,5275 U2.16@3277,5275 ; C19.2@3008.66,5780 ccw(c3058.13,5808.56) 3043.34,5753.39 ; 3158.75,7506.22 cw(c3177.75,7473.3) U1.3@3187.59,7510.01 ; U1.3@3211,7517 3185.78,7491.78 C3.1@3074,7491.78 ; P4.60@5200,8050 5263,8050 5263,7873 5262,7872 ; P4.60@5210.27,8043.33 cw(c5210.27,7991.54) 5262,7994 ; 5214,7871 ccw(c5211.54,7922.73) 5263.32,7922.73 ; 5265,7921 ccw(c5316.73,7923.46) 5316.73,7871.67 ; v6@5669.64,7200.36 ccw(c5651.86,7218.14) 5677,7218.14 ; v6(5676,7194) 5808,7326 v2(5964,7326) ; v6@5677,7198 5677,7725 5531,7871 4749.36,7871 4748.36,7872 3209,7872 3074,7737 C1.1@3074,7643.78 C3.1@3074,7491.78 ; 3074,7581.96 cw(c3128.32,7581.96) 3089.91,7620.37 ccw(c3128.32,7581.96) 3074,7581.96 ; 3074,7581.96 ccw(c3019.68,7581.96) 3058.09,7620.37 cw(c3019.68,7581.96) 3074,7581.96 ; 3074,7705.6 cw(c3019.68,7705.6) 3058.09,7667.19 ccw(c3019.68,7705.6) 3074,7705.6 ; 3074,7705.6 ccw(c3128.32,7705.6) 3089.91,7667.19 cw(c3128.32,7705.6) 3074,7705.6 ; 5249.33,8050 cw(c5249.33,8099.33) 5214.45,8064.45 ccw(c5249.33,8099.33) 5249.33,8050 ; 5249.33,8050 ccw(c5249.33,8000.67) 5214.45,8035.55 cw(c5249.33,8000.67) 5249.33,8050 ; K1.2@2300,6089.53 ccw(c2300,6122.19) 2323.09,6099.09 cw(c2300,6122.19) K1.2@2300,6089.53 ; K1.2@2314.53,6075 cw(c2352.01,6075) 2325.51,6101.51 ccw(c2352.01,6075) K1.2@2314.53,6075 ; v3@2768,7492 ccw(c2794.56,7492) 2775.78,7473.22 cw(c2794.56,7492) v3@2768,7492 ; 2969.39,5950.61 cw(c2943.79,5925) 2980,5925 ccw(c2943.79,5925) 2969.39,5950.61 ; C19.2@3000,5765 cw(c3000,5697.4) 3047.8,5745.2 ccw(c3000,5697.4) C19.2@3000,5765 ; 3048.39,7466.17 ccw(c3022.79,7491.78) 3059,7491.78 cw(c3022.79,7491.78) 3048.39,7466.17 ; 3113.71,7491.78 ccw(c3113.71,7592.04) 3184.6,7521.15 cw(c3113.71,7592.04) 3113.71,7491.78 ; 3186.13,7491.78 ccw(c3186.13,7519.62) 3205.82,7499.93 cw(c3186.13,7519.62) 3186.13,7491.78 ; 3231.05,5277.95 ccw(c3245.87,5292.76) 3245.87,5271.81 cw(c3245.87,5292.76) 3231.05,5277.95 ; P4.60@5210.22,8032.3 cw(c5228.41,8000.79) 5237.83,8035.94 ccw(c5228.41,8000.79) P4.60@5210.22,8032.3 ; P4.60@5219.38,8056.46 ccw(c5251.18,8067.06) 5242.5,8034.69 cw(c5251.18,8067.06) P4.60@5219.38,8056.46
  other v2: 8462,6026 8572,7578
  other v3: 2758,7492
BOOT0: R8.1 R18.1 U3.138 | length 1759.2
  Top Layer w10: R8.1@2995,6275 R18.1@2995,6155 R18.1@2996,6154 ; R8.1@3014.14,6260.86 cw(c3048.28,6226.72) 3048.28,6275 ; R8.1@3014.14,6289.14 ccw(c3048.28,6323.28) 3048.28,6275 ; v1(3289,6275) 3048.28,6275 ; 2995,6203.28 cw(c2946.72,6203.28) 2980.86,6169.14 ccw(c2946.72,6203.28) 2995,6203.28 ; 2995,6203.28 ccw(c3043.28,6203.28) 3009.14,6169.14 cw(c3043.28,6203.28) 2995,6203.28 ; 2995,6226.72 cw(c3043.28,6226.72) 3009.14,6260.86 ccw(c3043.28,6226.72) 2995,6226.72 ; 2995,6226.72 ccw(c2946.72,6226.72) 2980.86,6260.86 cw(c2946.72,6226.72) 2995,6226.72
  Bottom Layer w10: v1(3289,6275) 3494.61,6069.39 3495.61,6069.39 3624,5941 4102,5941 v1(4149,5894)
BOOT1: LCD.29 P4.35 R9.2 U3.48 | length 5051.9
  Top Layer w10: R9.2@2995,6625 v1(3117,6747) ; R9.2@3000,6625 ccw(c2988.75,6663.56) 3027.55,6653.16 ; R9.2@3002.8,6615.4 ccw(c2994.57,6643.6) R9.2@3022.95,6636 ; P4.35@3990.46,7950.76 ccw(c4024.13,7948.06) 4015.39,7915.44 ; P4.35@4000,7950 4000,7930 4049.74,7880.26 ; P4.35@4006.23,7957.26 cw(c3955.91,7898.62) 4032.96,7904.51 ; P4.35@4012.74,7964.85 cw(c3978.15,7924.53) 4031.12,7928.58 ; v1@4048.23,7239.23 cw(c4042.33,7233.33) 4050.68,7233.33 ; v1@4049.74,7241 4049.74,7880.26 ; v1(4050,7241) 4050.68,7240.32 U3.48@4050.68,6746.6 ; 4049.74,7880.26 cw(c4100.59,7931.11) 4029.91,7944.38 ccw(c4100.59,7931.11) 4049.74,7880.26 ; R9.2@3000,6645 ccw(c3000,6681.21) 3025.61,6655.61 cw(c3000,6681.21) R9.2@3000,6645 ; R9.2@3010,6625 cw(c3046.21,6625) 3020.61,6650.61 ccw(c3046.21,6625) R9.2@3010,6625 ; R9.2@3020,6625 cw(c3080.36,6625) 3037.68,6667.68 ccw(c3080.36,6625) R9.2@3020,6625 ; P4.35@4000,7919.57 cw(c4000,7894.38) 4017.81,7912.19 ccw(c4000,7894.38) P4.35@4000,7919.57 ; P4.35@4010.25,7948.07 ccw(c4055.46,7939.59) 4022.94,7907.06 cw(c4055.46,7939.59) P4.35@4010.25,7948.07 ; P4.35@4020.08,7946.23 ccw(c4078.03,7935.35) 4036.34,7893.66 cw(c4078.03,7935.35) P4.35@4020.08,7946.23
  Bottom Layer w10: v1(3117,6747) 3186,6816 3981,6816 v1@4050,6747 ; 4045.03,6751.97 ccw(c4051,6757.95) v1@4051,6749.5 ; v1@4049,7241 v1(4050,7241) 5171,7241 5425,7495 LCD.29@5425,7500 ; 5393.02,7473.97 cw(c5435.27,7462.65) LCD.29@5423.67,7504.82 ; 5403.67,7469.28 ccw(c5394.39,7503.93) LCD.29@5429.96,7499.36 ; 5378.79,7448.79 ccw(c5327.57,7500) 5400,7500 cw(c5327.57,7500) 5378.79,7448.79 ; 5390.86,7460.86 cw(c5425,7426.72) 5425,7475 ccw(c5425,7426.72) 5390.86,7460.86 ; 5395.86,7465.86 ccw(c5361.72,7500) 5410,7500 cw(c5361.72,7500) 5395.86,7465.86
  other v1: 4051,6747
"CH340 D+": U2.5 USB_1.3 | length 573.5
  Bottom Layer w15.75: v5@2558,5575 2679,5454 3020,5454 3041,5475 U2.5@3072.64,5475
  other v5: 2557,5575
"CH340 D-": U2.6 USB_1.2 | length 642.3
  Bottom Layer w20: v5@2561,5607 2569,5607 2681,5495 3003,5495 3033,5525 U2.6@3072.64,5525 ; v5(2560,5607) cw(c2560,5585.27) 2575.36,5600.64 ccw(c2560,5585.27) v5(2560,5607) ; 3024.15,5516.15 cw(c3041.14,5499.16) 3041.14,5523.19 ccw(c3041.14,5499.16) 3024.15,5516.15
CY1: P17.6 R10.1 R40.2 | length 3403.8
  Top Layer w10: v2(8226,7016) v2@8393,7016 ; v2@8232.36,7009.64 cw(c8247.73,6994.27) 8247.73,7016 cw(c8247.73,7037.73) v2@8232.36,7022.36 ; v2@8388.64,7009.64 ccw(c8373.27,6994.27) 8373.27,7016 ccw(c8373.27,7037.73) v2@8388.64,7022.36
  Bottom Layer w10: P17.6@6933.66,6044.34 ccw(c6891.79,6086.21) 6951,6086.21 ccw(c7010.21,6086.21) P17.6@6968.34,6044.34 ; P17.6@6940.73,6037.27 ccw(c6915.93,6062.07) 6951,6062.07 ccw(c6986.07,6062.07) P17.6@6961.27,6037.27 ; P17.6@6951,6027 6951,6614 7353,7016 v2@8225,7016 ; v2@8219.64,7009.64 ccw(c8204.27,6994.27) 8204.27,7016 ccw(c8204.27,7037.73) v2@8219.64,7022.36 ; v2@8225.5,7016.5 v2@8226,7017 ; v2(8395,7016) 8773,7016 R10.1@8788,7001 ; v2@8401.36,7009.64 cw(c8416.73,6994.27) 8416.73,7016 cw(c8416.73,7037.73) v2@8401.36,7022.36 ; 8693.67,7016 cw(c8693.67,6909.67) R10.1@8768.86,6984.86 ; 8717.82,7016 cw(c8717.82,6933.82) R10.1@8775.93,6991.93 ; 8741.96,7016 cw(c8741.96,6957.96) R10.1@8783,6999
  Bottom Layer w15: R10.1@8775.63,7011.37 ccw(c8745.75,7041.25) 8788,7041.25 ccw(c8830.25,7041.25) R10.1@8800.37,7011.37 ; R40.2@8775.63,7182.63 cw(c8745.75,7152.75) 8788,7152.75 cw(c8830.25,7152.75) R40.2@8800.37,7182.63 ; R10.1@8787,6997 8788,6998 R10.1@8788,6999 8788,7001 R40.2@8788,7195
CY2: P17.5 R11.1 R41.2 | length 3773.3
  Top Layer w10: v2(8200,7275) 8200,7276 8262,7338 8378,7338 v2@8379,7339 ; v2@8200,7284 ccw(c8200,7303.31) 8213.66,7289.66 ; v2@8209,7275 cw(c8233.14,7275) 8216.07,7292.07 ; v2@8373.64,7331.64 ccw(c8358.27,7316.27) 8358.27,7338 ccw(c8358.27,7359.73) v2@8373.64,7344.36
  Bottom Layer w10: P17.5@6833.66,6044.34 ccw(c6791.79,6086.21) 6851,6086.21 ccw(c6910.21,6086.21) P17.5@6868.34,6044.34 ; P17.5@6840.73,6037.27 ccw(c6815.93,6062.07) 6851,6062.07 ccw(c6886.07,6062.07) P17.5@6861.27,6037.27 ; P17.5@6851,6027 6851,6608 7518,7275 v2@8199,7275 ; v2@8193.64,7268.64 ccw(c8178.27,7253.27) 8178.27,7275 ccw(c8178.27,7296.73) v2@8193.64,7281.36 ; v2(8380,7338) 8794,7752 R41.2@8794,7762 ; v2@8380,7347 ccw(c8380,7368.73) 8395.36,7353.36 ccw(c8410.73,7338) v2@8389,7338 ; 8744.25,7702.25 ccw(c8684.5,7762) R41.2@8769,7762 ; 8761.32,7719.32 ccw(c8718.64,7762) R41.2@8779,7762 ; 8778.39,7736.39 ccw(c8752.79,7762) R41.2@8789,7762 ; R41.2@8780.46,7738.46 cw(c8789,7729.93) R41.2@8789,7742
  Bottom Layer w15: R41.2@8781.63,7774.37 ccw(c8751.75,7804.25) 8794,7804.25 ccw(c8836.25,7804.25) R41.2@8806.37,7774.37 ; R11.1@8781.63,7946.63 cw(c8751.75,7916.75) 8794,7916.75 cw(c8836.25,7916.75) R11.1@8806.37,7946.63 ; R41.2@8793,7762 8794,7763 R11.1@8794,7959
CY3: P17.8 R34.1 R42.2 | length 2444
  Top Layer w10: P17.8@7151,6027 7944,6027 8169,5802 v2@8282,5802 ; P17.8@7161.27,6016.73 cw(c7186.07,5991.93) 7186.07,6027 cw(c7186.07,6062.07) P17.8@7161.27,6037.27 ; P17.8@7168.34,6009.66 cw(c7210.21,5967.79) 7210.21,6027 cw(c7210.21,6086.21) P17.8@7168.34,6044.34 ; v2@8278.64,5795.64 ccw(c8263.27,5780.27) 8263.27,5802 ccw(c8263.27,5823.73) v2@8278.64,5808.36
  Bottom Layer w10: v2(8285,5802) 8367,5802 8443,5878 8625,5878 R42.2@8765,5738 ; v2@8291.36,5795.64 cw(c8306.73,5780.27) 8306.73,5802 cw(c8306.73,5823.73) v2@8291.36,5808.36 ; 8722.32,5780.68 cw(c8679.64,5738) R42.2@8740,5738 ; 8734.39,5768.61 ccw(c8760,5794.21) R42.2@8760,5758 ; 8739.39,5763.61 cw(c8713.79,5738) R42.2@8750,5738
  Bottom Layer w15: R42.2@8752.63,5725.63 cw(c8722.75,5695.75) 8765,5695.75 cw(c8807.25,5695.75) R42.2@8777.37,5725.63 ; R34.1@8754.63,5553.37 ccw(c8729.58,5578.42) 8765,5578.42 ; R34.1@8765,5541 R42.2@8765,5738 ; 8765,5588.08 ccw(c8814.08,5588.08) R34.1@8779.37,5553.37